# Altium PCB PCB1.PcbDoc (part 2 of 2)
Units mil, origin at the board's own origin, x right, y up, seen from the top; angles counter-clockwise.
Board outline 3950.01 x 3140.03 mil, 2 copper layers (Top Layer, Bottom Layer); 178 components, 190 nets, 658 pads, 219 vias.
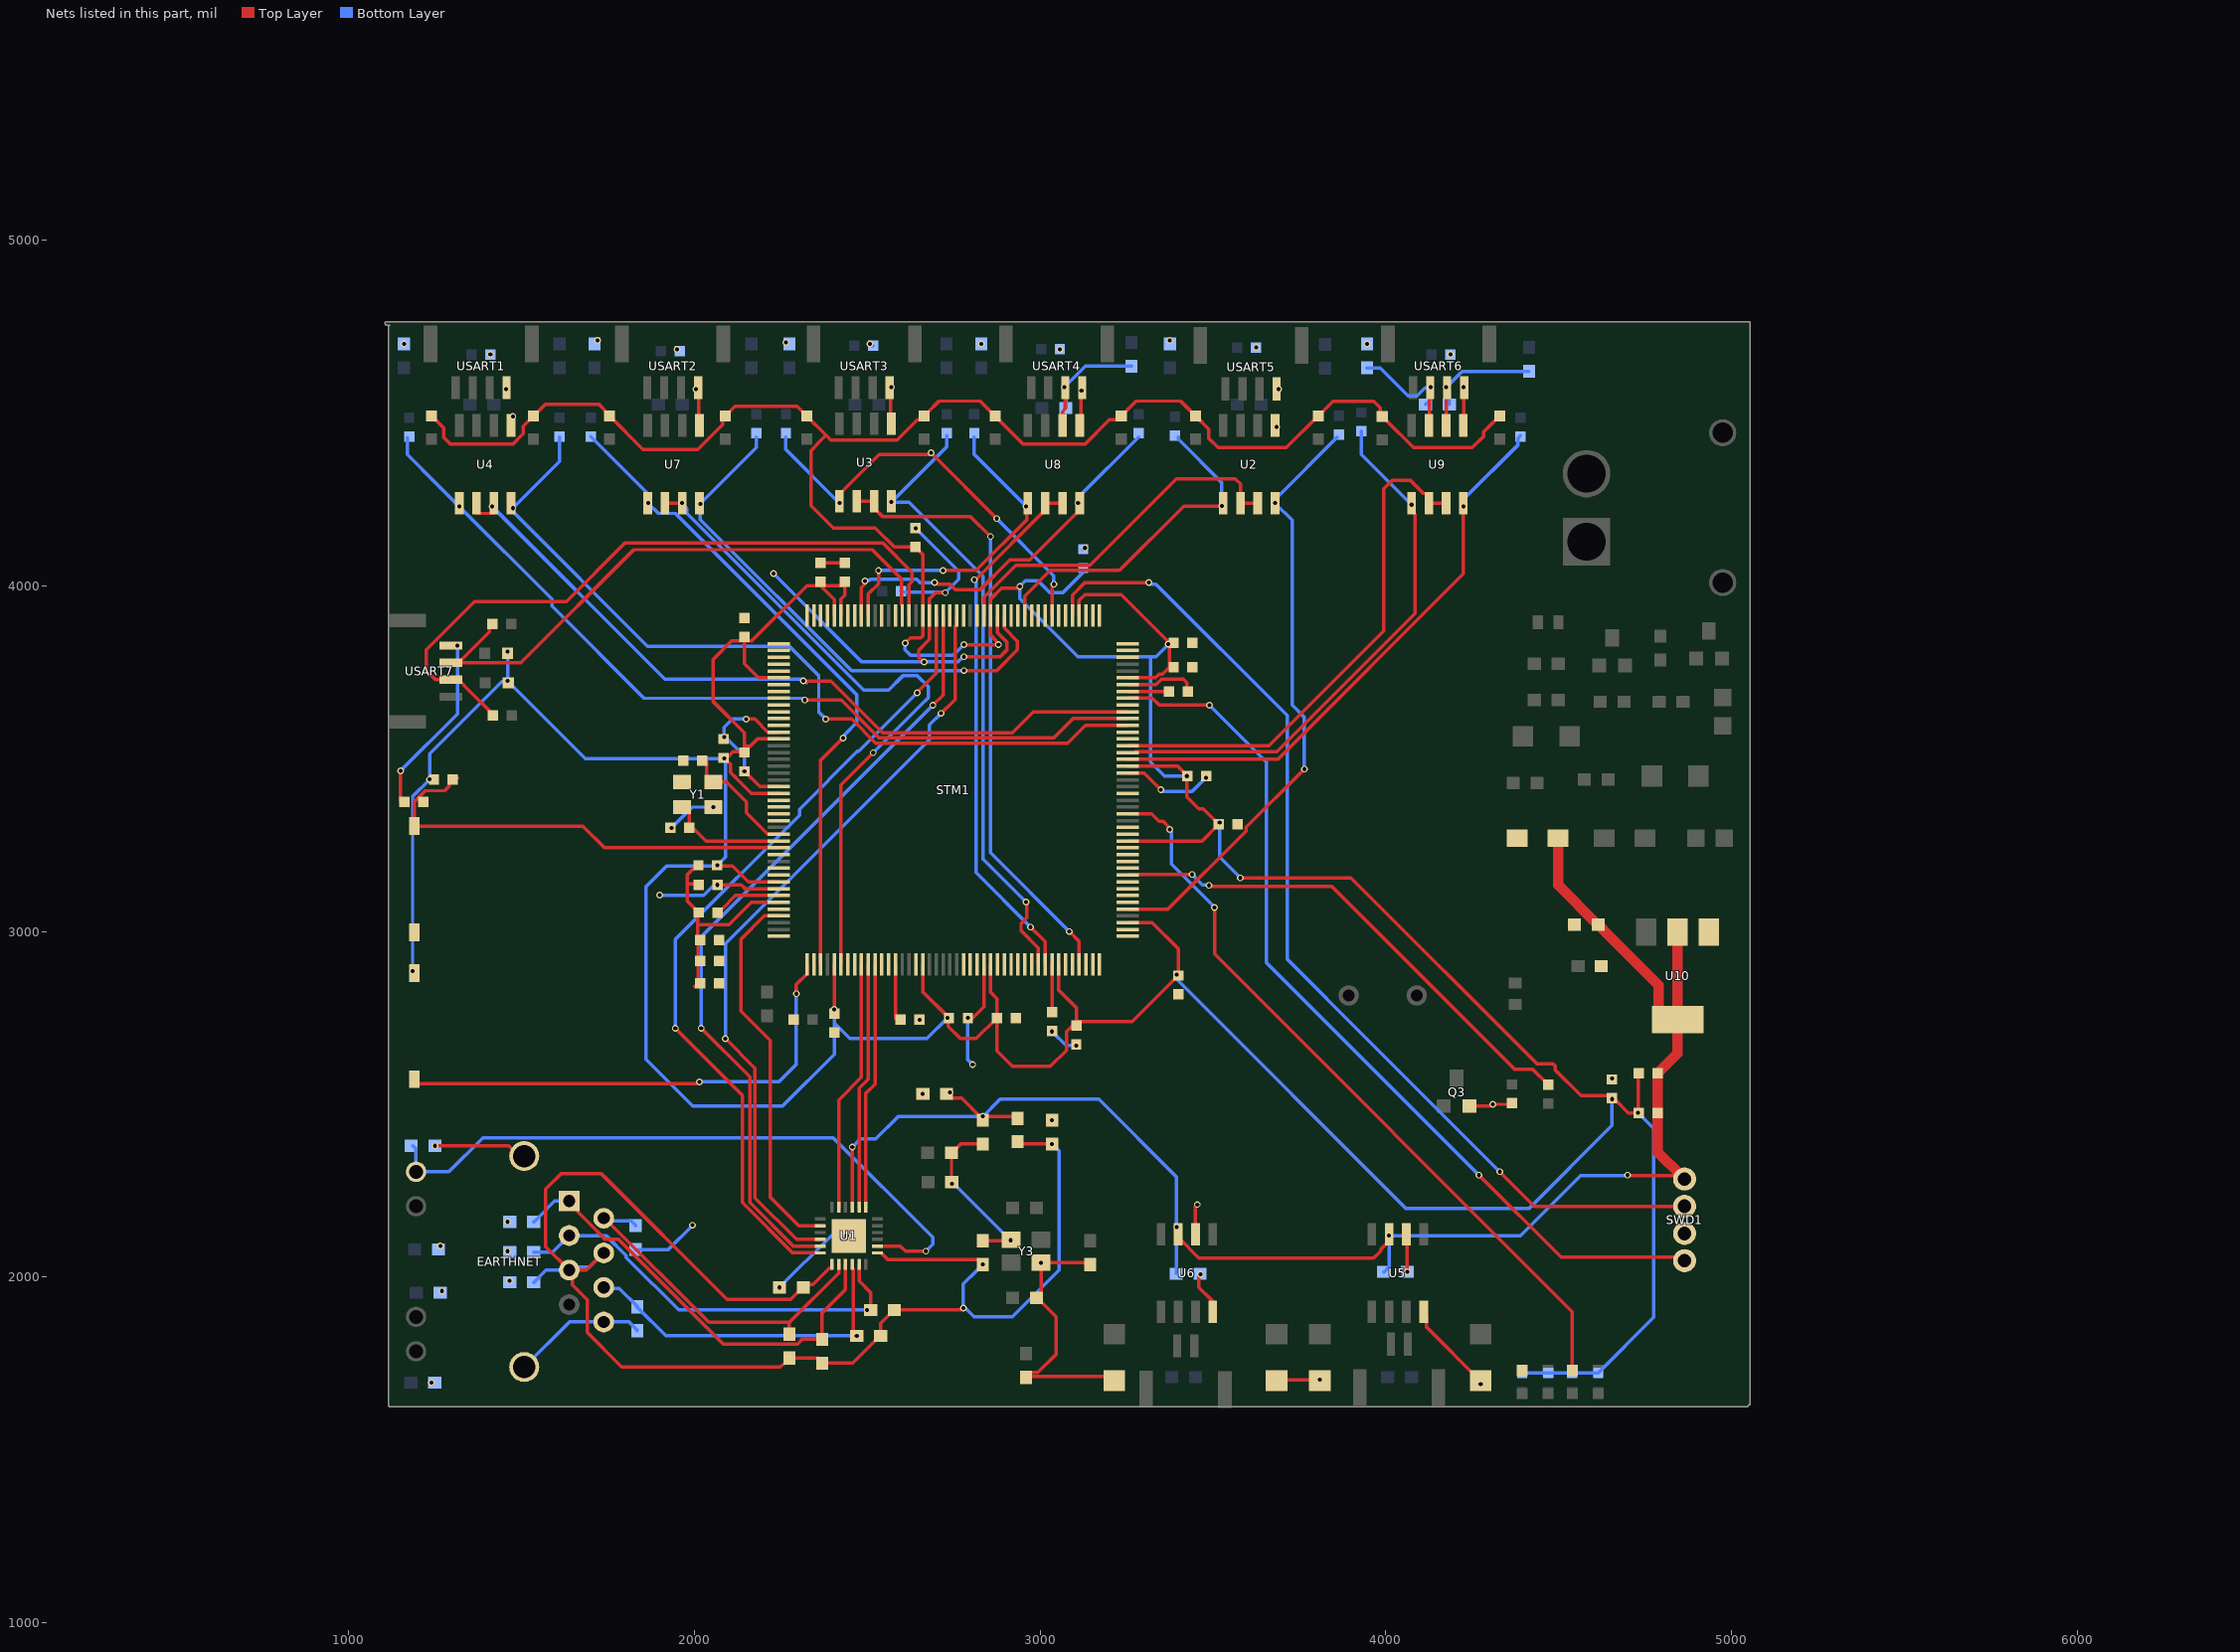
[diagram p2: the nets of this part, all layers, seen from the top]

## Via types
v1: diameter 19.68, hole 11.81, Top Layer to Bottom Layer, 214 vias
v2: diameter 137.8, hole 118.11, Top Layer to Bottom Layer, 3 vias
v3: diameter 100, hole 100, Top Layer to Bottom Layer, 2 vias

## Nets (pads, with @x,y where several pads share a name; then routed paths per layer and width w, separated by ;. In a path a pad name is that pad's centre, name@x,y a point inside that pad or via, vN(x,y) a via of type N, cw(c..) or ccw(c..) an arc to the next point about the centre after c; other vN are vias at no path point) (continued)
NetR43_1: R43.1 R44.2 U8.6 USART4.3 | length 397.4
  Top Layer w10: U8.6@3065,4464.41 3065,4504.41 3072.95,4512.36 3072.95,4572.05 v1(3070,4575)
  Bottom Layer w10: R43.1@3075,4515 3075,4567.38 3070,4572.38 v1(3070,4575) 3131,4636 R44.2@3265,4636
NetR45_1: R45.1 R46.2 U9.7 USART6.2 | length 393.8
  Top Layer w10: U9.7@4125,4464.41 4126.87,4466.28 4126.87,4571.87 v1(4130,4575)
  Bottom Layer w10: R45.1@3946,4631 3946.46,4630.54 3984.2,4630.54 4064.59,4550.16 4090.29,4550.16 4113.28,4573.15 4128.15,4573.15 v1(4130,4575) ; R46.2@4115,4525 4115.9,4525 4128.4,4537.5 4128.4,4549.31 4129.4,4550.3 v1@4129.4,4571.9
NetR46_1: R46.1 R47.2 U9.6 USART6.3 | length 423.4
  Top Layer w10: U9.6@4175,4464.41 v1(4175,4575)
  Bottom Layer w10: R46.1@4184,4525 4184,4563.38 4175,4572.38 v1(4175,4575) 4221,4621 R47.2@4415,4621
OSC32_IN: STM1.9
OSC32_OUT: STM1.10
OSC_IN: C4.2 STM1.29 Y1.3 | length 344
  Top Layer w10: C4.2@2035,3495 2035,3448.5 2050.67,3432.83 Y1.3@2055,3432.83 2093.43,3432.83 2150.73,3375.53 2150.73,3343.59 2212.73,3281.59 STM1.29@2244.67,3281.59
OSC_OUT: C3.2 STM1.30 Y1.1 | length 340.6
  Top Layer w10: Y1.1@1964.45,3360 1969.37,3360 1985.04,3344.33 1985.04,3310.59 1989.1,3306.53 1995.63,3300 2033.72,3261.91 STM1.30@2244.67,3261.91
PA0: STM1.40
PA3: R20.2 STM1.47 U7.1 | length 1919.6
  Top Layer w10: U7.1@1865,4240 v1(1866.25,4240) ; STM1.47@2365.36,2905 2365.36,3495.36 v1(2430,3560)
  Bottom Layer w10: R20.2@1700.06,4432.5 1866.25,4266.31 v1(1866.25,4240) 1896.25,4210 1945,4210 2470,3685 2470,3605 2434.84,3569.84 2434.84,3567.46 2430,3562.62 v1(2430,3560)
PA4: STM1.50 U7.2 U7.3 | length 1933.2
  Top Layer w10: U7.2@1915,4240 v1(1965,4240) ; STM1.50@2424.41,2905 2424.41,3424.28 v1(2517.57,3517.43)
  Bottom Layer w10: v1(1965,4240) 1965,4237.38 1978.07,4224.31 1978.07,4210.71 2490,3698.79 2562.12,3698.79 2603.17,3739.84 2645.16,3739.84 2676.64,3708.36 2676.64,3676.51 2657.36,3657.23 v1(2517.57,3517.43)
PA5: STM1.51
PA6: STM1.52
PA8: STM1.119
PA9: R65.2 STM1.120 U4.4 | length 2427.8
  Top Layer w10: U4.4@1470,4240 1475,4235 v1(1475,4225) ; v1(2380,3615) 2455.13,3615 2525.13,3545 3080,3545 3131.56,3596.56 STM1.120@3253.76,3596.56
  Bottom Layer w10: R65.2@1610,4430.63 1610,4360 v1(1475,4225) 1476.85,4223.15 1476.85,4213.15 1865,3825 2275,3825 2360,3740 2360,3635 v1(2380,3615)
PA10: R54.2 STM1.121 U4.1 | length 2516.4
  Top Layer w10: v1(1320,4230) U4.1@1320,4240 ; v1(2320,3670) 2425,3670 2535,3560 3040,3560 3096.24,3616.24 STM1.121@3253.76,3616.24
  Bottom Layer w10: R54.2@1170,4430 1170,4380 1254.07,4295.93 v1(1320,4230) 1588.43,3961.57 1588.43,3941.57 1855,3675 v1@2320,3675
PA11: STM1.122 U4.2 U4.3 | length 2196.3
  Top Layer w10: U4.2@1370,4210 U4.3@1420,4210 ; v1(2315,3725) 2395,3725 2545,3575 2920,3575 2980.93,3635.93 STM1.122@3253.76,3635.93
  Bottom Layer w10: v1(1415,4230) 1915,3730 2315,3730 2324.22,3720.78
PA12: STM1.123
PA13: STM1.124 SWD1.4 | length 2625.2
  Top Layer w10: STM1.124@3253.76,3675.3 3324.7,3675.3 3345,3655 v1(3490,3655) ; v1(4270,2295) 4507.48,2057.52 4855,2057.52 SWD1.4@4865,2047.52
  Bottom Layer w10: v1(3490,3655) 3655.16,3489.84 3655.16,2909.84 v1(4270,2295)
PA14: STM1.137 SWD1.2 | length 3004.5
  Top Layer w10: STM1.137@3093.7,3914.09 3093.7,3973.7 3130,4010 v1(3315,4010) ; v1(4330,2305) 4430,2205 SWD1.2@4865,2205
  Bottom Layer w10: v1@3315,4005 3335,4005 3715,3625 3715,2920 3947.05,2687.95 v1(4330,2305)
PA15: STM1.138
PB0: STM1.56
PB1: STM1.57
PB2: R50.2 STM1.58 | length 161.3
  Top Layer w10: STM1.58@2581.89,2905 2581.89,2748.11 R50.2@2585,2745
PB3: R22.2 STM1.161 USART7.2 | length 2007
  Top Layer w10: R22.2@1417.5,3625.06 1407.5,3635.06 1407.5,3638.88 1350,3696.38 1317.64,3728.74 USART7.2@1295.98,3728.74 1251.26,3728.74 1225,3755 1225,3815.6 1364.4,3955 1630,3955 1800,4125 2545,4125 2630,4040 2630,4012.38 2621.26,4003.64 STM1.161@2621.26,3914.09
PB4: R19.2 STM1.162 USART7.3 | length 1733.9
  Top Layer w10: USART7.3@1295.98,3777.95 USART7.3@1317.64,3777.95 ; R19.2@1415.5,3890.06 1407.02,3881.58 1407.02,3867.33 USART7.3@1317.64,3777.95 ; STM1.162@2601.58,3914.09 2601.58,3944.5 2600,3946.08 2600,4020 2515,4105 1825,4105 1497.95,3777.95 USART7.3@1317.64,3777.95
PB5: STM1.163
PB7: STM1.165
PB8: R56.2 STM1.167 U8.1 | length 935.1
  Top Layer w10: STM1.167@2503.15,3914.09 2503.15,3976.99 2533.12,4006.96 v1(2533.12,4045) ; v1(2720,4045) 2815,4045 2962.5,4192.5 2962.5,4227.5 v1(2960,4230)
  Bottom Layer w10: v1(2533.12,4045) v1(2720,4045) ; R56.2@2810,4430.63 2810,4380 v1(2960,4230)
PB9: R51.2 STM1.168 U8.4 | length 1117.7
  Top Layer w10: STM1.168@2483.47,3914.09 2483.47,3995.22 2493.15,4004.9 2493.15,4013.15 v1(2494.07,4014.07) ; v1(2695,4010) 2697.62,4010 2702.62,4005 2740,4005 2756.46,3988.54 2826.04,3988.54 2912.5,4075 2970,4075 3110,4215 v1(3110,4240)
  Bottom Layer w10: v1(2494.07,4014.07) 2495.93,4015.93 2505.93,4015.93 2510,4020 2642.38,4020 2652.38,4010 v1(2695,4010) ; v1(3110,4240) 3111.85,4241.85 3111.85,4257.48 R51.2@3285,4430.63
PB10: R53.2 STM1.79 U3.4 | length 1819.2
  Top Layer w10: v1(2570,4242.8) U3.4@2570,4245.59 ; v1(2960,3085) 2961.85,3083.15 2961.85,3039.62 2945.32,3023.09 2945.32,3002.51 2995.28,2952.54 STM1.79@2995.28,2905
  Bottom Layer w10: R53.2@2730,4435.63 2730,4402.8 v1(2570,4242.8) 2620.55,4242.8 2700.12,4163.22 2835,4028.35 2835,3210 v1(2960,3085)
PB11: STM1.80 U8.2 U8.3 | length 1556.4
  Top Layer w10: v1(2810.16,4018.06) 2812.01,4019.91 2814.91,4019.91 3015,4220 U8.2@3015,4240 U8.3@3065,4240 ; v1(2972.78,3012.8) 3014.96,2970.61 STM1.80@3014.96,2905
  Bottom Layer w10: v1(2810.16,4018.06) 2810.16,4015.43 2815,4010.59 2815,3170.57 v1(2972.78,3012.8)
PB13: R59.2 STM1.93 U2.4 | length 1755.7
  Top Layer w10: STM1.93@3253.76,3065.06 3370.79,3065.06 3596.37,3290.64 3596.37,3301.37 v1(3765,3470)
  Bottom Layer w10: v1(3765,3470) 3765,3620 3730,3655 3730,4190 v1(3680,4240) 3681.85,4241.85 3681.85,4252.48 R59.2@3860,4430.63
PB14: STM1.94
PB15: STM1.95
PC0: STM1.32
PC2: STM1.34
PC3: STM1.35
PC6: R60.2 STM1.115 U9.4 | length 1662
  Top Layer w10: STM1.115@3253.76,3498.13 3688.13,3498.13 4225,4035 v1(4225,4230)
  Bottom Layer w10: v1(4225,4230) 4226.85,4231.85 4226.85,4251.85 4383.36,4408.36 4383.36,4428.36 R60.2@4390,4435
PC7: R21.2 STM1.116 U9.1 | length 1572.4
  Top Layer w10: STM1.116@3275,3520 3685,3520 4085,3920 4085,4207.5 4082.5,4210 4082.5,4217.5 4075,4225 U9.1@4075,4240
  Bottom Layer w10: R21.2@3930.06,4447.5 3930,4447.44 3930,4380 v1(4075,4235)
PC8: STM1.117 U9.2 U9.3 | length 1510.4
  Top Layer w10: STM1.117@3253.76,3537.5 3662.5,3537.5 3995,3870 3995,4280.86 4020.43,4306.29 4070.78,4306.29 4109.57,4267.5 4117.5,4267.5 4125,4260 U9.2@4125,4240 ; U9.2@4134.14,4240 U9.3@4175,4240
PC9: STM1.118
PC10: STM1.139
PC11: R52.2 STM1.140 U3.1 | length 1216.3
  Top Layer w10: v1(2420,4240) U3.1@2420,4245.59 2420,4265.59 2534.41,4380 v1@2684.57,4380 ; v1(2684.57,4385.43) v1@2684.57,4380 ; v1@2689.93,4380.07 2689.87,4380 v1@2684.57,4380 ; v1@2690,4380 v1(2875,4195) ; STM1.140@3034.65,3914.09 3034.65,3944.5 3035,3944.86 3035,3997.38 3040,4002.38 v1(3040,4005)
  Bottom Layer w10: R52.2@2265,4430.63 2265,4395 v1(2420,4240) ; v1(2875,4195) 3040,4030 v1(3040,4005)
PC12: STM1.141
PC13: STM1.8
PD0: STM1.142
PD1: STM1.143
PD2: R55.2 STM1.144 U2.1 | length 1004.3
  Top Layer w10: STM1.144@2955.91,3914.09 2955.91,3970.91 3030,4045 3230,4045 3416.25,4231.25 3517.5,4231.25 3521.88,4235.62 3525.62,4235.62 U2.1@3530,4240 3530,4235 v1(3526.25,4231.25)
  Bottom Layer w10: R55.2@3400,4430.63 3400,4425 3526.25,4298.75 v1(3526.25,4231.25)
PD3: STM1.145
PD4: STM1.146
PD5: R57.2 STM1.147 U7.4 | length 1547.4
  Top Layer w10: U7.4@2015,4240 v1(2017.5,4237.5) ; v1(2780,3755) 2875,3755 2935,3815 2935,3840 2896.85,3878.15 STM1.147@2896.85,3914.09
  Bottom Layer w10: R57.2@2180,4430.63 2180,4400 v1(2017.5,4237.5) 2017.5,4192.5 2455,3755 v1(2780,3755)
PD6: STM1.150 U2.2 U2.3 | length 1048.9
  Top Layer w10: STM1.150@2837.8,3914.09 2837.8,3967.8 2930,4060 3145,4060 3395,4310 3565,4310 3580,4295 U2.2@3580,4240 U2.3@3630,4240
PD7: STM1.151
PD8: STM1.96
PD9: STM1.97
PD10: R35.1 STM1.98 | length 1468.7
  Top Layer w10: STM1.98@3253.76,3163.48 3284.17,3163.48 3285.69,3165 v1(3440,3165) ; v1(3488.47,3133.47) 3490.32,3131.62 3495.87,3131.62 3497.49,3130 3845,3130 4373,2602 4425,2602 R35.1@4470,2557
  Bottom Layer w10: v1(3440,3165) 3469.68,3135.32 3486.62,3135.32 v1(3488.47,3133.47)
PD11: STM1.99
PD12: STM1.100
PD13: STM1.101
PD14: STM1.104
PD15: STM1.105
PDR_ON: C6.2 C9.2 C11.2 C15.2 C16.2 C17.2 C18.2 C19.2 C22.2 C24.2 C27.2 C29.2 C30.2 C31.2 C33.2 C34.2 C39.1 KEY.2 PWR5.1 PWR6.1 PWR7.1 PWR8.1 PWR9.1 PWR10.1 PWR11.1 PWR12.1 PWR13.1 PWR15.1 PWR16.1 PWR17.1 PWR18.1 PWR19.1 R3.2 R4.2 R16.2 R17.2 R61.2 R62.2 R63.2 R64.2 STM1.6 STM1.15 STM1.23 STM1.36 STM1.49 STM1.62 STM1.72 STM1.82 STM1.91 STM1.103 STM1.114 STM1.127 STM1.136 STM1.149 STM1.159 STM1.171 STM1.172 | length 19791
  Top Layer w10: PWR13.1@1240,4491.93 1275.5,4456.43 1275.5,4429.5 1295,4410 1474.73,4410 1505.32,4440.59 1505.32,4462.25 PWR19.1@1535,4491.93 1568.07,4525 1725,4525 1744,4506 1744,4502.93 PWR10.1@1755,4491.93 1851.93,4395 2010,4395 2081.86,4466.86 2081.86,4483.79 PWR11.1@2090,4491.93 2118.07,4520 2296.93,4520 PWR5.1@2325,4491.93 2380.96,4435.96 ; v1(1460,3725) 1460,3721.93 PWR7.1@1461.93,3720 ; R16.2@2065.18,3188.71 2063.41,3188.71 R16.2@2066.49,3191.79 v1(2066.55,3191.85) 2068.41,3190 2110,3190 2156.2,3143.8 STM1.36@2244.67,3143.8 ; C9.2@2084.94,3502.5 2086.28,3501.15 v1(2086.28,3500.66) ; C30.2@2145,3530 2135.06,3520.06 2135.06,3520 2112.44,3520 2094.93,3502.5 2094.93,3494.21 2104.94,3484.21 2104.94,3460.06 2120,3445 2120,3444.49 2125.86,3438.63 2126.37,3438.63 2165.29,3399.71 STM1.23@2244.67,3399.71 ; C30.2@2145.06,3518.13 2145.06,3536.78 ; STM1.15@2244.67,3557.19 2182.19,3557.19 2161.78,3536.78 2145.06,3536.78 ; STM1.6@2244.67,3734.35 2185.65,3734.35 2145,3775 C6.2@2145,3840.63 ; STM1.49@2404.73,2905 2404.73,2877.52 2405,2877.25 v1(2405,2774.37) ; STM1.172@2404.73,3914.09 2404.73,3960.9 C11.2@2365,4000.63 ; STM1.171@2424.41,3914.09 2424.41,3962.4 2435,3972.99 2435,4000.63 C11.2@2365,4000.63 ; v1(2610,3835) 2625.01,3850.01 2654.77,3850.01 2660.63,3855.87 STM1.159@2660.63,3914.09 2660.63,4091.81 C33.2@2639.94,4112.5 2578.71,4112.5 2523.4,4167.81 2402.18,4167.81 2337.18,4232.81 2337.18,4391.04 2356.57,4410.43 2356.57,4411.57 2380.96,4435.96 ; STM1.62@2660.63,2905 2660.63,2826.3 2732.46,2754.48 v1(2732.46,2750.06) C27.2@2736.87,2750.06 ; C27.2@2733.39,2746.59 2732.46,2745.65 2735,2743.11 2735,2725 2770,2690 2815.44,2690 C39.1@2875.5,2750.06 2875.63,2750.19 2875.63,2805.59 2857.48,2823.74 STM1.72@2857.48,2905 ; v1(2780,3830) v1(2880,3830) 2880,3832.62 2872,3840.62 2872,3843 2857.48,3857.52 STM1.149@2857.48,3914.09 2857.48,3962.48 2888.15,3993.15 v1@2941.85,3993.15 ; C39.1@2875.63,2750.06 2875.63,2654.37 2920,2610 3030,2610 3076.59,2656.59 3076.59,2710.96 C24.2@3105,2739.37 ; STM1.82@3054.33,2905 3054.33,2830.67 3105,2780 C24.2@3105,2739.37 ; STM1.136@3113.39,3914.09 3113.39,3958.39 3130,3975 3235,3975 C18.2@3375,3835 ; STM1.91@3253.76,3025.69 3324.31,3025.69 3400,2950 C16.2@3400,2884.37 ; STM1.103@3253.76,3261.91 3468.72,3261.91 C22.2@3516.87,3310.06 ; STM1.114@3253.76,3478.45 3398.49,3478.45 C19.2@3426.87,3450.06 3426.81,3450 v1(3425,3450) ; STM1.127@3253.76,3734.35 3334.43,3734.35 3345.08,3745 3355,3745 3375,3765 C18.2@3375,3835 ; v1(3371.5,3831.5) C18.2@3375,3835 ; v1(3395,2875) 3395,2867.44 3266.93,2739.37 C24.2@3105,2739.37 ; C19.2@3425,3448.19 3425,3390 3459.97,3355.03 3471.9,3355.03 C22.2@3516.87,3310.06 ; v1(3520,3315) 3516.87,3311.87 C22.2@3516.87,3310.06 ; v1(3580,3155) 3900,3155 4438,2617 4484.14,2617 4490,2611.14 4490,2600 4565,2525 4650,2525 C34.2@4660,2515 ; PWR16.1@4330,4491.93 4284.11,4446.03 4284.11,4434.11 4250,4400 4080.27,4400 4001.27,4479 4001,4479 4000,4480 4000,4500 3985.86,4500 3984.86,4501 3984.86,4515.14 3965.39,4534.61 3847.69,4534.61 3816,4502.93 PWR18.1@3805,4491.93 3713.07,4400 3515,4400 3488,4427 3488,4453.93 PWR17.1@3450,4491.93 3406.93,4535 3278.07,4535 PWR8.1@3235,4491.93 3224,4480.93 3200.93,4480.93 3130,4410 2951.93,4410 PWR9.1@2870,4491.93 2826.93,4535 2708.07,4535 2676,4502.93 PWR12.1@2665,4491.93 2654,4480.93 2645.93,4480.93 2586.93,4421.93 2395,4421.93 2380.96,4435.96 ; v1(4655.13,2515) C34.2@4657.56,2515 ; C34.2@4662.44,2515 4702.44,2475 v1(4730.63,2475) 4730.63,2588.19 R4.2@4732.5,2590.06 ; C6.2@2145,3840.63 2108.13,3840.63 2055,3787.5 2055,3665 2145.06,3574.94 2145.06,3536.78 ; C6.2@2145,3840.63 2145.32,3840.95 2165.95,3840.95 2325.63,4000.63 C11.2@2365,4000.63
  Bottom Layer w10: v1(1185,2885) 1185,3390.63 v1(1234.37,3440) 1234.37,3514.37 1443.15,3723.15 1458.15,3723.15 v1(1460,3725) ; v1(1460,3810) v1(1460,3725) ; v1(2066.55,3191.85) v1@2066.31,3191.6 ; v1(2405,2774.37) 2405,2735 ; v1(2610,3835) 2610,3815 2625,3800 2749.3,3800 2779.3,3830 v1(2780,3830) ; v1(2732.46,2750.06) 2672.39,2690 2450,2690 2405,2735 ; C31.2@3125,4040 3065,3980 3029.13,3980 2994.13,4015 2958.08,4015 v1(2941.85,3998.78) 2941.85,3963.15 3109.55,3795.45 3320.22,3795.45 ; v1(3371.5,3831.5) 3335.45,3795.45 3320.22,3795.45 ; v1(3395,2875) 3396.26,2873.74 3396.26,2861.13 4059.27,2198.12 4414.27,2198.12 4655.13,2438.98 v1(4655.13,2515) ; v1(3425,3450) 3360,3450 3320,3490 3320,3795.22 3320.22,3795.45 ; v1(3520,3315) 3520,3215 v1(3580,3155) ; R61.2@4394.94,1723.13 R63.2@4469.94,1723.13 R64.2@4539.94,1723.13 R62.2@4614.94,1723.13 4775,1883.19 4775,2430.63 v1(4730.63,2475) ; v1(1460,3725) 1685,3500 2085.62,3500 v1(2086.28,3500.66) 2086.28,3498.04 2090,3494.32 2090,3215.3 2068.4,3193.69 2066.31,3193.69 v1@2066.31,3191.6 ; v1@2066.31,3191.6 2064.7,3190 1920,3190 1860,3130 1860,2630 1995,2495 2255,2495 2405,2645 2405,2735
PE0: STM1.169
PE1: STM1.170
PE2: STM1.1
PE3: STM1.2
PE4: STM1.3
PE5: STM1.4
PE6: STM1.5
PE7: STM1.68
PE8: STM1.69
PE9: STM1.70
PE10: STM1.73
PE11: STM1.74
PE12: STM1.75
PE13: STM1.76
PE14: STM1.77
PE15: STM1.78
PF6: STM1.24
PF7: STM1.25
PF8: STM1.26
PF9: STM1.27
PG3: PWR1.2 STM1.107 | length 2190.8
  Top Layer w10: STM1.107@3253.76,3340.65 3322.63,3340.65 3344.56,3318.72 3356.52,3318.72 3371.99,3303.25 3371.99,3300.64 3375,3297.62 v1(3375,3295) ; v1(3505,3070) 3505,2935 4540,1900 PWR1.2@4540,1730
  Bottom Layer w10: v1(3375,3295) 3375,3292.38 3380,3287.38 3380,3195 v1(3505,3070)
PG6: STM1.110
PG10: STM1.153
PG12: STM1.155
PH3: STM1.44
PH4: KEY.1 STM1.45 | length 1437.2
  Top Layer w10: KEY.1@1190,2572.91 1190,2570.75 1200.75,2560 2007.38,2560 2012.38,2565 v1(2015,2565) ; v1(2295,2820) 2295,2846.54 2325.98,2877.52 STM1.45@2325.98,2905
  Bottom Layer w10: v1(2015,2565) 2245,2565 2295,2615 v1(2295,2820)
PH5: STM1.46
PH6: STM1.83
PH7: STM1.84
PH8: STM1.85 U3.2 U3.3 | length 1785.4
  Top Layer w10: U3.2@2470,4245.59 U3.3@2520,4245.59 2520,4225.59 2545.59,4200 2799.89,4200 v1(2856.86,4143.03) ; v1(3084.93,2999.93) 3085.07,2999.93 3113.39,2971.61 STM1.85@3113.39,2905
  Bottom Layer w10: v1(2856.86,4143.03) 2856.86,3228.14 3084.93,3000.07 v1(3084.93,2999.93)
PH9: STM1.86
PH10: STM1.87
PH11: STM1.88
PH12: STM1.89
PH15: STM1.130
PI0: STM1.131
PI1: STM1.132
PI2: STM1.133
PI3: STM1.134
PI4: STM1.173
PI5: STM1.174
PI6: STM1.175
PI7: STM1.176
PI8: STM1.7
PI9: STM1.11
PI10: STM1.12
PI11: STM1.13
RESET: C42.1 R17.1 RESET.1 STM1.31 | length 1310.1
  Top Layer w10: R17.1@1314.67,3444.67 1305.68,3435.68 1297.06,3435.68 1291.37,3430 1291.37,3421.37 1277.5,3407.5 1221.87,3407.5 1189.37,3375 1189.37,3305.63 RESET.1@1190,3305 1677.58,3305 1740.36,3242.22 STM1.31@2244.67,3242.22
RMII_CRS_DV: STM1.53 U1.11 | length 730.3
  Top Layer w10: U1.11@2417.75,2201.94 2417.75,2512.24 2483.47,2577.96 STM1.53@2483.47,2905
RMII_REF_CLK: STM1.41 U1.14 | length 1097.9
  Top Layer w10: STM1.41@2244.67,3045.37 2202.95,3045.37 2135,2977.43 2135,2770 2220,2685 2220,2635 2220.42,2634.58 2220.42,2230.8 2302.47,2148.74 U1.14@2364.55,2148.74
RMII_RXD0: STM1.54 U1.8 | length 714
  Top Layer w10: U1.8@2476.8,2201.94 2476.8,2546.8 2503.15,2573.15 STM1.54@2503.15,2905
RMII_RXD1: STM1.55 U1.7 | length 714
  Top Layer w10: U1.7@2496.49,2201.94 2496.49,2531.93 2522.84,2558.28 STM1.55@2522.84,2905
RMII_TX_EN: STM1.154 U1.16 | length 2236
  Top Layer w10: v1(2090,2690) 2175.61,2604.39 2175.61,2229.39 2295.63,2109.37 U1.16@2364.55,2109.37 ; v1(2713.77,3631.3) 2754.37,3671.89 2754.37,3881.93 2759.06,3886.61 STM1.154@2759.06,3914.09
  Bottom Layer w10: v1(2090,2690) 2090,2965 2680,3555 2680,3597.52 v1(2713.77,3631.3)
RMII_TXD0: STM1.156 U1.17 | length 2302.7
  Top Layer w10: v1(2020,2720) 2160.61,2579.39 2160.61,2215.61 2286.53,2089.68 U1.17@2364.55,2089.68 ; v1(2690,3655) 2719.69,3684.69 STM1.156@2719.69,3914.09
  Bottom Layer w10: v1(2020,2720) 2020,2984.73 2690,3654.73 v1(2690,3655)
RMII_TXD1: STM1.157 U1.18 | length 2368.6
  Top Layer w10: v1(1945,2720) 2139.24,2525.76 2139.24,2215.76 2284.92,2070.08 U1.18@2353.8,2070.08 ; v1(2645,3691.25) 2645,3692.5 2700,3747.5 STM1.157@2700,3914.09
  Bottom Layer w10: v1(1945,2720) 1945,2977.37 2304.07,3336.45 2304.07,3354.07 2471.74,3521.74 2475.49,3521.74 v1(2645,3691.25)
SGND: C3.1 C4.1 C5.1 C6.1 C7.1 C8.1 C9.1 C10.1 C11.1 C12.1 C13.1 C14.1 C15.1 C16.1 C17.1 C18.1 C19.1 C20.1 C21.1 C22.1 C23.1 C24.1 C25.1 C26.1 C27.1 C28.1 C29.1 C30.1 C31.1 C32.1 C33.1 C34.1 C35.1 C36.1 C37.2 C38.2 C39.2 C40.1 C41.1 C42.2 C43.2 C44.2 C45.2 C47.2 C48.2 C49.2 C50.2 C53.2 C54.2 C55.1 EARTHNET.8 EARTHNET.13 EARTHNET.14 L2.2 PWR4.2 Q3.2 R2.1 R10.2 R11.2 R12.1 R13.1 R15.2 R18.2 R26.2 R28.2 R30.2 R37.1 R39.2 R42.2 R45.2 R50.1 RESET.2 STM1.14 STM1.22 STM1.37 STM1.61 STM1.71 STM1.90 STM1.102 STM1.113 STM1.126 STM1.135 STM1.148 STM1.158 SWD1.3 TVS1.1 TVS2.1 TVS3.1 TVS4.1 U1.25 U2.5 U3.5 U4.5 U5.2 U5.8 U6.2 U6.8 U7.5 U8.5 U9.5 U10.1 USART1.4 USART2.4 USART3.4 USART4.4 USART5.4 USART6.4 USART7.4 Y1.2 Y1.4 Y3.2 Y3.4 | length 7777.1
  Top Layer w10: C42.2@1150,3375 v1(1150,3465.16) ; v1@1252.11,2380 1463.75,2380 1493.63,2350.12 EARTHNET.13@1507.91,2350.12 ; v1(1455,4570) 1457.17,4572.17 USART1.4@1457.17,4574.02 USART1.4@1463.51,4574.02 ; C3.1@1930.5,3300.06 v1(1934.2,3300.06) ; v1(2005,4570) 2013.08,4561.92 2013.08,4466.32 U7.5@2015,4464.41 ; C40.1@2057,3135 v1(2067,3135) 2136.24,3135 2147.13,3124.11 STM1.37@2244.67,3124.11 ; C9.1@2085,3557 2086.25,3557 v1(2086.25,3563.25) ; v1(2145,3463.63) 2189.24,3419.39 STM1.22@2244.67,3419.39 ; v1(2150,3615) 2150.24,3614.76 2174.84,3614.76 2212.73,3576.87 STM1.14@2244.67,3576.87 ; C11.1@2365,4067 C15.1@2435,4067 ; v1(2441.39,2120.16) 2442.33,2119.21 U1.25@2447.28,2119.21 ; U3.5@2570,4470 2567.58,4472.42 2567.58,4572.58 v1(2570,4575) USART3.4@2570,4590.84 ; v1(2665,3780.08) 2662.38,3780.08 2649.03,3793.43 2649.03,3814.03 2680.32,3845.32 STM1.158@2680.32,3914.09 2680.32,3962.7 2698.3,3980.68 v1(2726.15,3980.68) ; C8.1@2744,2276 C7.1@2744,2360 2745.5,2360 2770.5,2385 C26.1@2835,2385 ; v1(2780,3795) 2885,3795 2895,3805 2895,3805.86 2905,3815.86 2905,3836.89 2877.17,3864.72 STM1.148@2877.17,3914.09 ; v1(2791.37,2750) 2805,2750 2837.8,2782.8 STM1.71@2837.8,2905 ; C12.1@2835,2105 2913.23,2105 v1(2914.96,2106.73) Y3.4@2916.69,2108.46 ; C5.1@2990,1940 C5.1@2990.81,1940 ; v1(3034.94,2710.61) C37.2@3034.94,2712.5 ; v1(3105,2670) C24.1@3105,2673 ; U8.5@3115,4464.41 3118.58,4467.99 3118.58,4563.58 v1(3120,4565) ; C13.1@3145,2036 3139.46,2041.54 v1(3003.31,2041.54) 3003.31,1952.5 C5.1@2990.81,1940 ; TVS4.1@3215,1712.58 2962.58,1712.58 R2.1@2960,1710 2960,1711.5 2972.5,1724 2994,1724 3046.5,1776.5 3046.5,1885 2991.5,1940 C5.1@2990.81,1940 ; STM1.113@3253.76,3458.76 3301.24,3458.76 v1(3350,3410) ; STM1.126@3253.76,3714.67 3335.96,3714.67 3341.36,3720.06 3341.54,3720.06 3351.48,3730 3415,3730 3425,3720 3425,3697.44 C38.2@3427.5,3694.94 ; U6.2@3450,2135 3450,2205 v1(3455,2210) ; v1@3470,2010 3465.86,2010 3460,2004.14 3460,1970.59 3500,1930.59 U6.8@3500,1910.59 ; TVS3.1@3685,1702.58 TVS2.1@3810,1702.58 ; TVS2.1@3810,1700.16 TVS2.1@3810,1702.58 ; v1(3810,1703.79) TVS2.1@3810,1702.58 ; TVS2.1@3819.44,1702.58 TVS2.1@3810,1702.58 ; U5.2@4060,2120 4061.5,2118.5 4061.5,2016.5 v1(4063,2015) ; U5.8@4110,1895.59 4117.5,1888.09 4117.5,1856.08 4275,1698.58 v1(4275,1690) ; U9.5@4225,4464.41 4226.08,4465.49 4226.08,4573.92 v1(4225,4575) ; Q3.2@4243,2495 4302.38,2495 4307.38,2500 R37.1@4375.87,2500
  Bottom Layer w10: v1(1150,3465.16) 1314.84,3630 v1(1314.84,3827.17) ; EARTHNET.14@1507.91,1739.88 1638.23,1870.2 EARTHNET.8@1737.91,1870.2 1811.3,1870.2 1835,1846.5 C28.1@1835,1845 ; C23.1@1830,2080 1925,2080 v1(1995,2150) ; v1(1900,3105) 2027,3105 2057,3135 v1(2067,3135) ; v1(1934.2,3300.06) 1994.14,3360 v1(2055,3360) ; v1(2145,3463.63) 2145,3507 2088.75,3563.25 v1(2086.25,3563.25) 2086.25,3591.25 2110,3615 v1(2150,3615) ; v1(2228.74,4036.26) 2484.92,3780.08 v1(2665,3780.08) 2762.46,3780.08 2777.38,3795 v1(2780,3795) ; v1(2246,1970) 2396.16,2120.16 v1(2441.39,2120.16) ; v1(2508.12,4700.06) 2513.12,4695.06 C44.2@2517.5,4695.06 ; R18.2@2597.5,3985.06 2600.41,3982.15 2724.69,3982.15 v1(2726.15,3980.68) 2726.15,3980.91 2765,4019.76 2765,4042 2707,4100 v1(2640,4167) ; v1(2745,2270) 2746.85,2268.15 2753.55,2268.15 v1(2914.96,2106.73) ; v1(2791.37,2750) 2791.37,2628.63 v1(2805,2615) ; v1(3034.94,2710.61) 3034.94,2710.06 3075,2670 v1(3105,2670) ; C31.1@3125,4106.37 3128.63,4110 v1(3130,4110) ; v1(3350,3410) 3352.62,3410 3357.62,3405 3440,3405 v1(3480,3445) ; C48.2@3463,2010 v1(3464.75,2008.25) ; C50.2@3625,4690 v1(3625.62,4690)
  other v1: 1240,1695 1270,1960 1465,1990 1460,2075 1265,2090 1460,2160 1250,2380 3035,2454 4310,2500 2661,2530 4655,2575 2651.37,2745 3685,4460 1475,4490 3690,4570 1410,4670 4187.5,4670.06 1950,4685 3057.5,4685.06 1160,4700 2830,4700 3946,4700 2265,4705 1720,4710 3375,4710
"SPEED LED": EARTHNET.9 R11.1 U1.2 | length 1928.6
  Top Layer w10: U1.2@2530,2089.68 2595.87,2089.68 2610.56,2075 v1(2670,2075)
  Bottom Layer w10: R11.1@1186,2380 1195,2371 EARTHNET.9@1195,2304.84 1289.84,2304.84 1388.43,2403.43 2401.57,2403.43 2690,2115 2690,2095 v1(2670,2075)
TPRX+: C25.2 EARTHNET.3 R8.1 U1.23 | length 1222.2
  Top Layer w10: U1.23@2476.8,2036.49 2476.8,1988.26 2510,1955.06 R8.1@2510,1905
  Bottom Layer w10: C25.2@1535,2072.5 1590.22,2072.5 EARTHNET.3@1637.91,2120.2 1744.48,2120.2 1802.5,2062.18 1802.5,2056.86 1808.36,2051 1809,2051 1955,1905 v1(2500,1905)
TPRX-: C28.2 EARTHNET.6 R9.1 U1.22 | length 1007.6
  Top Layer w10: U1.22@2457.2,2025.74 2460,2022.94 2460,1842.5 2471.75,1830.75 2476.75,1830.75 2482.5,1825 R9.1@2484,1825
  Bottom Layer w10: EARTHNET.6@1737.91,1970.2 1740.52,1967.59 1782.91,1967.59 1835,1915.5 C28.2@1835,1914 1835,1912.5 1917.5,1830 v1(2470,1830)
TPTX+: C21.2 EARTHNET.1 R6.1 U1.21 | length 1286.4
  Top Layer w10: EARTHNET.1@1637.91,2220.2 1662.91,2195.2 1662.91,2188.63 1697.91,2153.63 1741.34,2110.2 1779.8,2110.2 2084,1806 2298.43,1806 2312.43,1820 R6.1@2370,1820 2370,1896.19 2437.43,1963.63 U1.21@2437.43,2036.49
  Bottom Layer w10: C21.2@1535,2160 1536.5,2160 1572.1,2195.6 1572.1,2197.1 1595.2,2220.2 EARTHNET.1@1637.91,2220.2
TPTX-: C23.2 EARTHNET.2 R7.1 U1.20 | length 1022.5
  Top Layer w10: EARTHNET.2@1737.91,2170.2 1741.02,2170.2 2042.21,1869 2269.14,1869 2272.07,1866.07 ; R7.1@2275,1835 2275,1869 2417.67,2011.67 2417.67,2036.41 U1.20@2417.75,2036.49
  Bottom Layer w10: EARTHNET.2@1737.91,2170.2 1745.11,2163 1817.5,2163 1830,2150.5 C23.2@1830,2149
VCAP_1: C37.1 STM1.81 | length 138.1
  Top Layer w10: STM1.81@3034.65,2905 3034.65,2767.35 C37.1@3035,2767
VCAP_2: C38.1 STM1.125 | length 106.7
  Top Layer w10: STM1.125@3253.76,3694.98 C38.1@3360.5,3694.98
VCC3.3: C10.2 C26.2 C47.1 C48.1 C53.1 C55.2 L1.2 R3.1 R4.1 SWD1.1 U1.9 U5.3 U6.3 U10.2 | length 4947.5
  Top Layer w10: v1(2456.96,2376.1) 2456.96,2310.31 2457.12,2310.16 U1.9@2457.12,2201.94 ; v1(2740,2535) 2740,2521.5 2744,2517.5 2773,2517.5 C26.2@2830.25,2460.25 ; v1(2835,2465) 2928.87,2465 L1.2@2935,2458.87 ; U6.3@3400,2124.41 3400,2115 3460,2055 3960,2055 ; 3965,2055 3985.56,2075.56 3985.56,2079.97 4010,2104.41 v1(4010,2120) U5.3@4010,2124.41 ; v1(4700,2295) 4701.85,2293.15 4855.59,2293.15 SWD1.1@4865,2283.74
  Top Layer w30: C53.1@4499,3270 4499,3134.5 4613.5,3020 C55.2@4615,3020 4616.5,3020 4629,3007.5 4629,3006 4790,2845 4790,2769.5 4814.5,2745 U10.2@4845,2745 ; U10.2@4844.33,2998.54 4844.33,2745.67 U10.2@4845,2745 ; SWD1.1@4855.59,2293.15 4787,2361.74 R4.1@4787,2590 4845,2648 U10.2@4845,2745
  Bottom Layer w10: v1(2456.96,2376.1) 2480.86,2400 2525,2400 2590,2465 v1(2835,2465) 2885,2515 3170,2515 3395,2290 v1@3395,2145 ; C48.1@3394,2010 3395.07,2011.07 v1(3395.07,2144.93) ; C47.1@3994,2015 3995.5,2015 4008,2027.5 4008,2029 4010,2031 v1(4010,2120) 4390,2120 4563.74,2293.74 v1@4700,2293.74
VCC3.3E: C12.2 C14.2 C20.2 C32.2 EARTHNET.4 EARTHNET.5 L1.1 R6.2 R7.2 R8.2 R9.2 U1.1 U1.19 | length 4395.3
  Top Layer w10: EARTHNET.4@1737.91,2070.2 1687.91,2020.2 EARTHNET.5@1637.91,2020.2 ; U1.19@2398.06,2036.49 2398.06,2025.82 2397.99,2025.74 2390.74,2025.74 2343.14,1978.14 2323.14,1978.14 C14.2@2315,1970 2313.5,1970 2278.5,1935 2095,1935 1730,2300 1615.66,2300 1575.86,2260.2 1570,2254.34 1570,2088.11 EARTHNET.5@1637.91,2020.2 ; U1.1@2530,2070 2540.67,2070 2560.67,2050 2822.5,2050 2835,2037.5 C12.2@2835,2036 v1(2835,2036.75) ; v1(2778.03,1910) 2777.38,1910 2772.38,1905 R8.2@2579,1905 2577.5,1905 2539,1866.5 R9.2@2539,1830 2537.5,1830 2458.5,1751 R6.2@2370,1751 2370,1752.5 2356.5,1766 R7.2@2275,1766 2275,1764.5 2262.5,1752 2261,1752 2249,1740 1790,1740 1690,1840 1690,1934.58 1647.48,1977.1 1647.48,2010.63 EARTHNET.5@1637.91,2020.2 ; L1.1@2935,2392 2942,2385 v1(3035,2385)
  Bottom Layer w10: C20.2@1535,1985 1536.5,1985 1571.7,2020.2 EARTHNET.5@1637.91,2020.2 1646.44,2028.73 1696.44,2028.73 EARTHNET.4@1737.91,2070.2 ; v1(2835,2036.75) 2815.91,2017.66 2778.03,1979.78 v1(2778.03,1910) 2779.89,1908.15 2786.74,1908.15 2809.88,1885 2920,1885 3055,2020 3055,2365 v1(3035,2385)
VDDA: C35.2 C36.2 C40.2 C41.2 R14.2 R16.1 STM1.39 | length 674
  Top Layer w10: 2000.5,2840.06 2010.5,2850.06 2010.5,2915.06 2010.5,2934.87 2010.63,2935 C41.2@2010.63,2980.06 ; C40.2@2002.5,3135.06 1999.18,3138.38 1980,3138.38 ; R14.2@2007.76,3060.32 1980,3088.08 1980,3138.38 ; R16.1@2008.57,3193.15 1980,3164.57 1980,3138.38 ; C41.2@2017.5,2975.06 2010,2982.56 2010,3020 ; R14.2@2022.5,3055.06 2010,3042.56 2010,3020 ; STM1.39@2244.67,3084.74 2164.74,3084.74 2100,3020 2010,3020
VREF+: R14.1 STM1.38 | length 187.2
  Top Layer w10: R14.1@2074.7,3062.7 2077,3065 2080,3065 2119.43,3104.43 STM1.38@2244.67,3104.43
pads on no net: CAN1.0 CAN2.0 EARTHNET.7 P1.0 STM1.16 STM1.17 STM1.18 STM1.19 STM1.20 STM1.21 STM1.28 STM1.59 STM1.60 STM1.63 STM1.64 STM1.65 STM1.66 STM1.67 STM1.106 STM1.111 STM1.112 STM1.152 STM1.160 U1.10 U5.5 U6.5 USART1.0 USART2.0 USART3.0 USART4.0 USART5.0 USART6.0 USART7.0
copper on no net:
  other v1: 4990,5235
  other v2: 4925,1732.28 1545,2952.76 4925,4645.67
  other v3: 1385,1820 1390,2270

## Polygon pours and split planes (outlines as drawn)
GND on Bottom Layer "GND_L02_P000" (solid, remove dead copper, pour order 0): 235,5215 390,5060 5150,5060 5150,1110 4915,1345 355,1345
SGND on Top Layer "SGND_L01_P001" (solid, remove dead copper, pour order 1): 340,5515 6140,5515 6340,5315 5410,4385 5410,1090 1100,1090 470,1720

## Silkscreen, mask and mechanical layers (free items; w line width, h text height)
Top Overlay:
  region: 3643.32,3781.77 3643.32,3781.11 3642.65,3781.11 3642.65,3781.77 3642.65,3782.44 3643.32,3782.44
  region: 3755.55,3580.23 3755.55,3574.84 3755.55,3569.45 3750.16,3569.45 3750.16,3564.06 3750.16,3558.67 3750.16,3553.28 3744.77,3553.28 3744.77,3558.67 3744.77,3564.06 3744.77,3569.45 3744.77,3574.84 3744.77,3580.23 3744.77,3585.62 3755.55,3585.62
  region: 3651.28,3345.27 3651.94,3345.27 3651.94,3344.61 3652.6,3344.61 3652.6,3343.94 3653.27,3343.94 3653.27,3343.28 3653.27,3342.62 3653.27,3341.95 3653.93,3341.95 3653.93,3341.29 3653.27,3341.29 3653.27,3341.95 3652.6,3341.95 3652.6,3341.29 3652.6,3340.63 3652.6,3339.96 3651.28,3339.96 3651.28,3340.63 3651.28,3341.29 3651.28,3341.95 3651.28,3342.62 3651.94,3342.62 3651.94,3343.28 3651.94,3343.94 3651.28,3343.94 3651.28,3344.61 3650.61,3344.61 3650.61,3345.27 3650.61,3345.93 3651.28,3345.93
  region: 3652.6,3349.25 3652.6,3348.59 3652.6,3347.92 3652.6,3347.26 3651.94,3347.26 3651.94,3347.92 3651.28,3347.92 3651.28,3348.59 3651.28,3349.25 3651.28,3349.91 3652.6,3349.91
  region: 3650.61,3337.97 3650.61,3337.31 3651.28,3337.31 3651.28,3336.65 3651.28,3335.98 3650.61,3335.98 3650.61,3336.65 3650.61,3337.31 3649.95,3337.31 3649.95,3337.97 3649.95,3338.64 3650.61,3338.64
  region: 3649.29,3334.66 3649.29,3333.99 3647.96,3333.99 3647.96,3334.66 3647.96,3335.32 3649.29,3335.32
  region: 3647.96,3332 3647.96,3331.34 3647.3,3331.34 3647.3,3332 3647.3,3332.66 3647.96,3332.66
  region: 3653.93,3334.66 3653.93,3333.99 3653.27,3333.99 3653.27,3334.66 3653.27,3335.32 3653.93,3335.32
  text "5V" at 4705,4590 h60 r90
  text "INPUT" at 4815,4465 h60 r90
  text "gnd A B VCC" at 4065,4161.88 h39.37 r180
  text "rx  tx" at 1225,4145 h60
  text "G T R V" at 1540,3905 h39.37 r270
  text "Design by" at 1405,2714.99 h60
  text "WangTian" at 1485,2624.99 h60
  text "BOOT1" at 2555,2585 h50
  text "for hitcrt" at 1435,2540 h60
  text "VCC3.3M" at 4980,2430 h40 r90
  text "L H" at 3355,2190 h60
  text "L H" at 3955,2190 h60
  text "dio gnd clk vcc" at 4726.88,1805 h39.37 r90
Bottom Overlay:
  drawing of 4 lines, arcs and shapes, not listed
  text "BOOT0" at 2720,3940 h50
Mechanical 1:
  lines w10: 1110,4760 1120,4750 1120,1630 5045,1630 5050,1635 5050,4760 1110,4760